# Altium PCB JacdacTempRhEc30 116.PcbDoc
Units mm, origin at the board's own origin, x right, y up, seen from the top; angles counter-clockwise.
Board outline 26.5 x 25 mm, 2 copper layers (Top Layer, Bottom Layer), stack 1.525 mm thick; 25 components, 26 nets, 90 pads, 20 vias.
Unrouted connection lines stored in the file: 10.
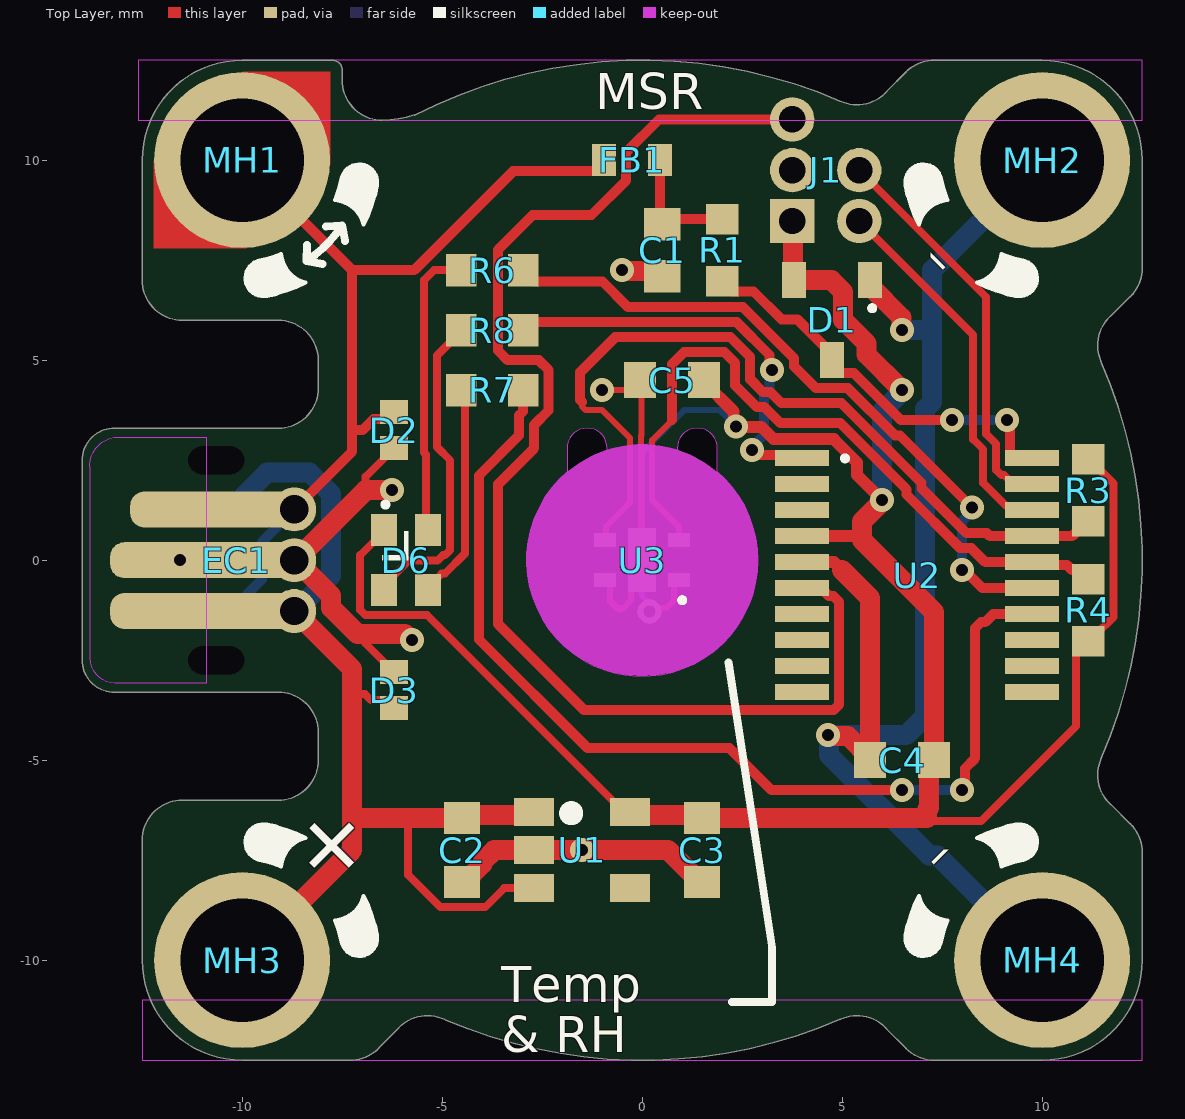
[diagram p0: Top Layer view]
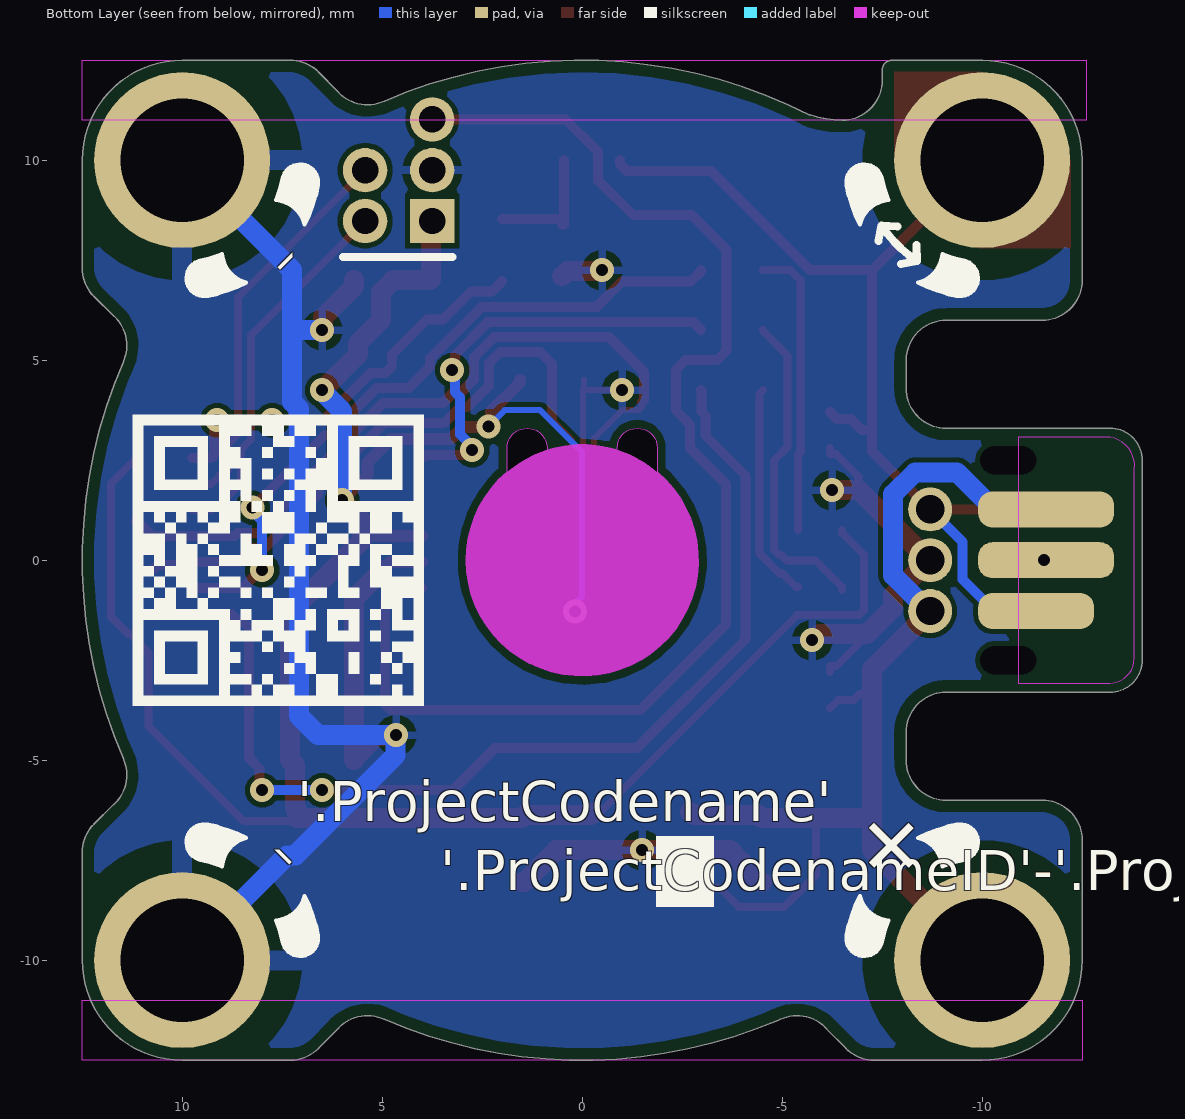
[diagram p1: Bottom Layer view, seen from below]
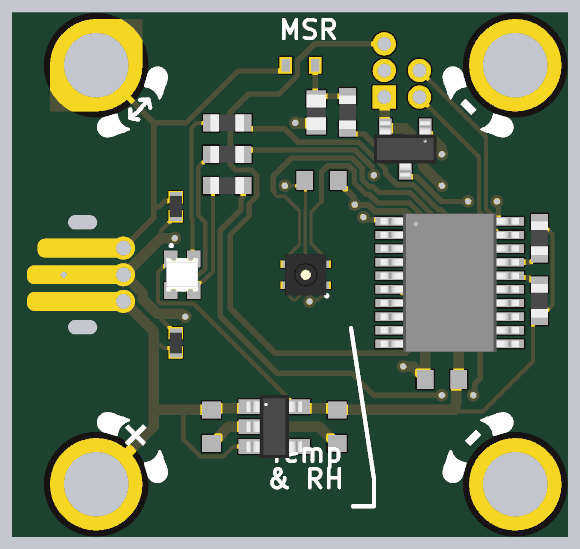
[diagram p2: 3D render of the assembled board from above, using the file's embedded part models]

## Layer stack, top to bottom
Top Solder: solder mask 0.0102, Solder Resist, Dk 3.5
Top Layer: signal copper 0.0356
Dielectric 1: core 1.454, FR-4, Dk 4.2
Bottom Layer: signal copper 0.0356
Bottom Solder: solder mask 0.0102, Solder Resist, Dk 3.5

## Board outline
-12.5,-7 cw(c-11.5,-7) -11.5,-6 -9.1,-6 ccw(c-9.1,-5) -8.1,-5 -8.1,-4.3 ccw(c-9.1,-4.3) -9.1,-3.3 -13.2,-3.3 cw(c-13.2,-2.5) -14,-2.5 -14,2.5 cw(c-13.2,2.5) -13.2,3.3 -9.1,3.3 -9.098,3.3 ccw(c-9.098,4.3) -8.098,4.3 -8.1,4.3 -8.1,5 ccw(c-9.1,5) -9.1,6 -11.5,6 cw(c-11.5,7) -12.5,7 -12.5,10 cw(c-10,10) -10,12.5 -7.75,12.5 cw(c-7.75,12.25) -7.5,12.25 -7.5,12 ccw(c-6.5,12) -6.5,11 ccw(c-6.5,13.5) -5.7,11.131 -5.698,11.126 cw(c0,0) 4.947,11.48 4.946,11.479 ccw(c5.369,12.385) 6.112,11.716 6.11,11.718 6.6,12.21 6.593,12.207 cw(c7.3,11.5) 7.3,12.5 10,12.5 cw(c10,10) 12.5,10 12.5,7.3 cw(c11.5,7.3) 12.207,6.593 12.21,6.6 11.718,6.11 11.716,6.112 ccw(c12.385,5.369) 11.479,4.946 11.48,4.947 cw(c0,0) 11.48,-4.947 11.479,-4.946 ccw(c12.385,-5.369) 11.716,-6.112 11.718,-6.11 12.21,-6.6 12.207,-6.593 cw(c11.5,-7.3) 12.5,-7.3 12.5,-10 cw(c10,-10) 10,-12.5 7.3,-12.5 cw(c7.3,-11.5) 6.593,-12.207 6.6,-12.21 6.11,-11.718 6.112,-11.716 ccw(c5.369,-12.385) 4.946,-11.479 4.947,-11.48 cw(c0,0) -4.904,-11.498 -4.946,-11.479 ccw(c-5.369,-12.385) -6.112,-11.716 -6.11,-11.718 -6.6,-12.21 -6.593,-12.207 cw(c-7.3,-11.5) -7.3,-12.5 -10,-12.5 cw(c-10,-10) -12.5,-10
cut-out: -1.091,1.555 ccw(c-1.377,1.966) -0.876,1.966 -0.876,2.8 ccw(c-1.376,2.8) -1.877,2.8 -1.877,2.211 ccw(c0,0) 2.9,0 ccw(c0,0) 1.877,2.211 1.877,2.8 ccw(c1.377,2.8) 0.877,2.8 0.876,1.966 ccw(c1.377,1.966) 1.091,1.555 cw(c0,0) 1.9,0 cw(c0,0)

## Design rules (kind name [scope] priority, off if disabled: settings)
AssemblyTestPointUsage [All] p1: valid=2
BoardOutlineClearance [All] p1: gap=0.3 ignorepadtopadclearanceinfootprint=FALSE except(0: Arc-SplitContinuation Track-SplitContinuation SMDPad-SplitContinuation THPad-SplitContinuation Via-SplitContinuation Fill-SplitContinuation Poly-SplitContinuation Region-OutlineEdge Region-SplitContinuation Text-OutlineEdge Text-SplitContinuation; 0.2: Track-OutlineEdge Fill-CavityEdge Fill-CutoutEdge Fill-SplitBarrior Poly-CavityEdge Poly-CutoutEdge Poly-SplitBarrior Text-CavityEdge Text-CutoutEdge Text-SplitBarrior; 0.25: SMDPad-OutlineEdge)
Clearance "Clearance MH" [InComponent('MH1') OR InComponent('MH2') OR InComponent('MH3') OR InComponent('MH4')] p1: gap=0.125 ignorepadtopadclearanceinfootprint=FALSE except(0: Arc-Hole Track-Hole SMDPad-Hole THPad-Hole Via-Hole Fill-Hole Poly-Hole Region-Hole Text-Hole; 0.8: Arc-Fill Arc-Poly Arc-Region Track-Fill Track-Poly Track-Region SMDPad-Fill SMDPad-Poly SMDPad-Region THPad-Fill THPad-Poly THPad-Region Via-Fill Via-Poly Via-Region Fill-Fill Fill-Poly Fill-Region Poly-Poly Poly-Region Region-Region)
Clearance [All] p2: gap=0.125 ignorepadtopadclearanceinfootprint=FALSE except(0: Arc-Hole Track-Hole SMDPad-Hole THPad-Hole Via-Hole Fill-Hole Poly-Hole Region-Hole Text-Hole)
ComponentClearance [All] p1: gap=0.1 collisioncheckmode=3 verticalgap=0.254 showdistances=FALSE
DiffPairsRouting [All] p1: maxlimit=2 minlimit=0.15 mostfreqgap=0.15 toplayer_minwidth=0.15 toplayer_maxwidth=2 toplayer_prefwidth=0.15 bottomlayer_minwidth=0.15 bottomlayer_maxwidth=2 bottomlayer_prefwidth=0.15 substack1={CB9D278B-8BF5-444A-AAF4-837A2A9DF42D} toplayer_{cb9d278b-8bf5-444a-aaf4-837a2a9df42d}_minwidth=0.381 toplayer_{cb9d278b-8bf5-444a-aaf4-837a2a9df42d}_maxwidth=0.381 toplayer_{cb9d278b-8bf5-444a-aaf4-837a2a9df42d}_prefwidth=0.381 bottomlayer_{cb9d278b-8bf5-444a-aaf4-837a2a9df42d}_minwidth=0.381 bottomlayer_{cb9d278b-8bf5-444a-aaf4-837a2a9df42d}_maxwidth=0.381 bottomlayer_{cb9d278b-8bf5-444a-aaf4-837a2a9df42d}_prefwidth=0.381 substack2={826B8647-A721-4255-895A-19F9591B9CD1} toplayer_{826b8647-a721-4255-895a-19f9591b9cd1}_minwidth=0.381 toplayer_{826b8647-a721-4255-895a-19f9591b9cd1}_maxwidth=0.381 toplayer_{826b8647-a721-4255-895a-19f9591b9cd1}_prefwidth=0.381 bottomlayer_{826b8647-a721-4255-895a-19f9591b9cd1}_minwidth=0.381 bottomlayer_{826b8647-a721-4255-895a-19f9591b9cd1}_maxwidth=0.381 bottomlayer_{826b8647-a721-4255-895a-19f9591b9cd1}_prefwidth=0.381 substack3={E64FCAF4-1BC8-437D-B1E0-0E5F2DC0F59E} toplayer_{e64fcaf4-1bc8-437d-b1e0-0e5f2dc0f59e}_minwidth=0.381 toplayer_{e64fcaf4-1bc8-437d-b1e0-0e5f2dc0f59e}_maxwidth=0.381 toplayer_{e64fcaf4-1bc8-437d-b1e0-0e5f2dc0f59e}_prefwidth=0.381 bottomlayer_{e64fcaf4-1bc8-437d-b1e0-0e5f2dc0f59e}_minwidth=0.381 bottomlayer_{e64fcaf4-1bc8-437d-b1e0-0e5f2dc0f59e}_maxwidth=0.381 bottomlayer_{e64fcaf4-1bc8-437d-b1e0-0e5f2dc0f59e}_prefwidth=0.381 substack4={E61CE66C-507C-4E1E-8E83-C905434AFC1C} toplayer_{e61ce66c-507c-4e1e-8e83-c905434afc1c}_minwidth=0.381 toplayer_{e61ce66c-507c-4e1e-8e83-c905434afc1c}_maxwidth=0.381 toplayer_{e61ce66c-507c-4e1e-8e83-c905434afc1c}_prefwidth=0.381 bottomlayer_{e61ce66c-507c-4e1e-8e83-c905434afc1c}_minwidth=0.381 bottomlayer_{e61ce66c-507c-4e1e-8e83-c905434afc1c}_maxwidth=0.381 bottomlayer_{e61ce66c-507c-4e1e-8e83-c905434afc1c}_prefwidth=0.381 maxuncoupledlength=25
FabricationTestPointUsage [All] p1: valid=2 allowmultiple=FALSE
HoleSize [All] p1: absolutevalues=TRUE maxlimit=3.1 minlimit=0.2 maxpercent=80.000 minpercent=20.000
MinimumSolderMaskSliver [All] p1: minsoldermaskwidth=0.005
PlaneClearance [All] p1: clearance=0.3
PlaneConnect "PlaneConnect MH" [InComponent('MH1') OR InComponent('MH2') OR InComponent('MH3') OR InComponent('MH4')] p1: planeconnectstyle=Relief reliefexpansion=0.5 reliefentries=4 reliefconductorwidth=0.5 reliefairgap=0.4
PlaneConnect [All] p2: planeconnectstyle=Relief reliefexpansion=0.5 reliefentries=4 reliefconductorwidth=0.2 reliefairgap=0.3
PolygonConnect "PolygonConnect MH" [InComponent('MH1') OR InComponent('MH2') OR InComponent('MH3') OR InComponent('MH4')] p1: connectstyle=Relief reliefconductorwidth=0.5 reliefentries=4 polygonreliefangle="90 Angle" airgapwidth=0.8
PolygonConnect [All] p2: connectstyle=Relief reliefconductorwidth=0.2 reliefentries=4 polygonreliefangle="90 Angle" airgapwidth=0.2
RoutingVias [All] p1: holewidth=0.3 width=0.6 viastyle="Through Hole" minholewidth=0.3 minwidth=0.6 maxholewidth=0.5 maxwidth=0.8
SilkToSilkClearance [All] p1: silktosilkclearance=0.001
SilkToSolderMaskClearance [IsPad] p1: minsilkscreentomaskgap=0.05 clearancetoexposedcopper=TRUE
SolderMaskExpansion [All] p1: expansion=0.075 istentingtop=FALSE
Width [All] p1: maxlimit=2 minlimit=0.15 preferedwidth=0.15 substack1={CB9D278B-8BF5-444A-AAF4-837A2A9DF42D} substack2={826B8647-A721-4255-895A-19F9591B9CD1} substack3={E64FCAF4-1BC8-437D-B1E0-0E5F2DC0F59E} substack4={E61CE66C-507C-4E1E-8E83-C905434AFC1C} minimp=50.000000 maximp=50.000000 favimp=50.000000
20 further rules are at their usual default settings.

## Components (designator, comment, footprint, x,y, rotation, side; value= is the part's Value field where it differs from the comment)
C1 "33 pF" CC0603 0.5,7.75 r90 top
C2 "1uF 16V" "C0603 - without outline" -4.5,-7.25 r90 top
C3 "1uF 16V" "C0603 - without outline" 1.5,-7.25 r90 top
C4 "1uF 16V" "C0603 - without outline" 6.5,-5 r0 top
C5 "1uF 16V" "C0603 - without outline" 0.75,4.5 r0 top
D1 "BAT54S" "NXP-BAT54S-TO-236AB - WITHOUT OUTLINE" 4.75,6 r270 top
D2 "RCLAMP0521P-N" "TVS 0402 - XL" -6.2,3.25 r270 top
D3 "RCLAMP0521P-N" "TVS 0402 - XL" -6.2,-3.25 r90 top
D6 "TZ-P4-1615RGBTCA1-0.55T" TZ-P4-1615RGBTCA1-0.55T -5.9,0 r270 top
EC1 "3 pin JACDAC edge connector" JACDAC_EDGE_CONNECTOR_NO_TRACES -8.15,0 r90 top
FB1 "TDK MPZ1608S102ATA00" "TDK MPZ1608 0.8mm - without outline" -0.25,10 r0 top
J1 "Hack Connect Mini 1.27 mm pitch 2-row" HACK_CONNECT_MINI_5_X_1_27 3.75,8.48 r0 top
MH1 "MH_7.0MMK_4.4MMC_3.1MMD_PTH" MH_7.0MMK_4.4MMC_3.1MMD_PTH -10,10 r0 top
MH2 "MH_7.0MMK_4.4MMC_3.1MMD_PTH" MH_7.0MMK_4.4MMC_3.1MMD_PTH 10,10 r180 top
MH3 "MH_7.0MMK_4.4MMC_3.1MMD_PTH" MH_7.0MMK_4.4MMC_3.1MMD_PTH -10,-10 r0 top
MH4 "MH_7.0MMK_4.4MMC_3.1MMD_PTH" MH_7.0MMK_4.4MMC_3.1MMD_PTH 10,-10 r180 top
R1 "220R" RC0603 2,7.75 r270 top
R3 "10k" RC0603 11.15,1.75 r270 top
R4 "10k" RC0603 11.15,-1.25 r90 top
R6 "150R" RC0603 -3.75,7.25 r0 top
R7 "30R" RC0603 -3.75,4.25 r0 top
R8 "30R" RC0603 -3.75,5.75 r0 top
U1 "ME6211C33M5G-N" MICRONE-SOT23-5 -1.5,-7.25 r0 top
U2 "STM32G030F6P6" 20-TSSOP 6.875,-0.375 r0 top
U3 "SHTC3" SHTC3_4_WDFN 0,0 r180 top

## Footprints (in the part's own frame and the unit in brackets; to place one, negate y for a bottom-side part, rotate by r counter-clockwise, add the part's x,y. Pads: shape width x height; smd on the part's side, far side on the other; paste and mask are expansions set on the pad)
20-TSSOP [mm]
  rect 1.35x0.4 smd: 1(-2.875,2.925) 2(-2.875,2.275) 3(-2.875,1.625) 4(-2.875,0.975) 5(-2.875,0.325) 6(-2.875,-0.325) 7(-2.875,-0.975) 8(-2.875,-1.625) 9(-2.875,-2.275) 10(-2.875,-2.925) 11(2.875,-2.925) 12(2.875,-2.275) 13(2.875,-1.625) 14(2.875,-0.975) 15(2.875,-0.325) 16(2.875,0.325) 17(2.875,0.975) 18(2.875,1.625) 19(2.875,2.275) 20(2.875,2.925)
  silkscreen extent -1.85,2.87 -1.76,2.97, body extent -3.3,-3.3 3.3,3.3, height 1.2
"C0603 - without outline" [mm]
  rect 0.8x0.9 smd: 1(-0.8,0) 2(0.8,0)
  body extent -0.9,-0.5 0.9,0.5, height 0.9
CC0603 [mil]
  rect 32x36 smd: 1(-25.5,0) 2(25.5,0)
  body extent -33,-18 34,18, height 36
HACK_CONNECT_MINI_5_X_1_27 [mm]
  rect 1.11x1.11 hole 0.66: 1(0,0)
  round 1.11 hole 0.66: 2(1.676,0) 3(0,1.27) 4(1.676,1.27) 5(0,2.54)
JACDAC_EDGE_CONNECTOR_NO_TRACES [mm] "Jacdac 3 pin connector with no traces"
  rrect78% 0.9x2.9 smd far side paste-1 mask+0: 1(-1.27,3.2)
  rrect78% 0.9x4.3 smd paste-1 mask+0: 1(1.27,2.5)
  round 1.1 hole 0.71 paste-0.254 mask+0: 1(1.27,0.55) 2(0,0.55) 3(-1.27,0.55)
  rrect78% 0.9x3.4 smd far side paste-1 mask+0: 2(0,3.45) 2(0,3.45) 3(1.27,3.45)
  rrect78% 0.9x4.8 smd paste-1 mask+0: 2(0,2.75) 3(-1.27,2.75)
  round 0 hole 0.7 slot 1.4 at 90 deg unplated: ""(-2.5,2.5) ""(2.5,2.5)
  Top Layer keep-out region: -3.075,2.75 -3.07,5.033 -2.987,5.341 -2.761,5.567 -2.453,5.65 -2.453,5.65 2.27,5.65 2.545,5.635 2.794,5.516 2.978,5.31 3.07,5.05 3.07,5.05 3.07,2.75
  Bottom Layer lines w0.2: -1.27,0.85 -1.126,0.85
  Bottom Layer keep-out region: -3.07,2.75 -3.07,5.033 -3.023,5.269 -2.889,5.469 -2.689,5.603 -2.453,5.65 -2.453,5.65 2.27,5.65 2.546,5.635 2.794,5.516 2.978,5.31 3.07,5.05 3.07,5.05 3.07,2.75
MH_7.0MMK_4.4MMC_3.1MMD_PTH [mm] "Jacdac mounting hole 7.0mm clearance, 4.4 annualar ring and 3.1mm PTH"
  round 4.4 hole 3.08 mask+0.3: 1(0,0)
MICRONE-SOT23-5 [mm]
  rect 1x0.7 smd: 1(-1.2,0.95) 2(-1.2,0) 3(-1.2,-0.95) 4(1.2,-0.95) 5(1.2,0.95)
  silkscreen extent -0.32,0.88 -0.23,0.97, body extent -1.32,-1.5 1.32,1.5, height 1.11
"NXP-BAT54S-TO-236AB - WITHOUT OUTLINE" [mm] "SOT23, 3-Leads, Body 2.90x2.30mm, Pitch 0.95mm, IPC Medium Density"
  rect 0.9x0.6 smd: 1(-1,0.95) 2(-1,-0.95) 3(1,0)
  silkscreen extent -0.35,0.95 -0.25,1.05, body extent -1.32,-1.5 1.32,1.5, height 1.12
RC0603 [mil]
  rect 30x32 smd: 1(-30.5,0) 2(30.5,0)
  body extent -31,-16 32,16, height 28
SHTC3_4_WDFN [mm] "Humidity Temperature Sensor 0 ~ 100% RH I²C ±2% RH 8s Surface Mount"
  rect 0.55x0.35 smd paste-0.5 mask+0.05: 1(-0.925,0.5) 2(-0.925,-0.5)
  rect 0.55x0.35 smd paste-0.6 mask+0.05: 3(0.925,-0.5)
  rect 0.55x0.35 smd paste-0.2 mask+0.05: 4(0.925,0.5)
  rect 0.7x1.6 smd paste-0.1 mask+0.05: 5(0,0)
  rect 0.45x0.35 on Top Paste paste-0.6 mask+0.05: ""(-0.875,-0.5) ""(-0.875,0.5) ""(0.875,-0.5) ""(0.875,0.5)
  silkscreen extent -1.05,0.95 -0.95,1.05, body extent -1,-1 1,1, height 0.75
"TDK MPZ1608 0.8mm - without outline" [mm]
  rect 0.6x0.8 smd paste-0.1: 1(-0.7,0) 2(0.7,0)
  body extent -0.8,-0.4 0.8,0.4, height 0.8
"TVS 0402 - XL" [mm] "TVS 0402 RoHS"
  rect 0.6x0.7 smd paste-0.06 mask+0.05: 1(-0.45,0) 2(0.45,0)
  body extent -0.5,-0.3 0.5,0.3, height 0.5
TZ-P4-1615RGBTCA1-0.55T [mm] "1615 Light Emitting Diodes (LED) RoHS"
  rect 0.8x0.65 smd mask+0.05: 1(-0.75,-0.55) 2(-0.75,0.55) 3(0.75,0.55) 4(0.75,-0.55)
  silkscreen extent -1.44,-0.6 0,0.05, body extent -0.8,-0.75 0.8,0.75, height 0.55

## Part data
C1: library part CC0603JRNPO9BN330, "33pF 0603 100V C0G/NPO", Capacitance=33pF, Case Code (Imperial)=0603, Case Code (Metric)=1608, Dielectric=C0G, Manufacturer=Yageo, Max Operating Temperature=125°C, Min Operating Temperature=-55°C, Tolerance=5%, Voltage Rating=100V, Case/Package=0603, Category="Ceramic Capacitors", ComponentLink1Description="Online datasheet", ComponentLink1URL=https://datasheet.ciiva.com/13207/upy-gp-np0-16v-to-50v-8-13207786.pdf, Composition=Ceramic, Depth=0.8mm, Height=0.8mm, Lead Free="Lead Free", Length=1.6mm, Manufacturer 1=Yageo, Manufacturer Part Number=CC0603JRNPO9BN330, Manufacturer Part Number 1=CC0603JRNPO9BN330, Mount="Surface Mount", Packaging="Tape and Reel", RoHS=Yes, Supplier 1=Digi-Key, Termination=SMD/SMT, Thickness=0.035inch, Voltage Rating (DC)=100V, Weight=7.1E-05oz, Width=0.8mm
C2 C3 C4 C5: library part CL10A105KO8NNNC, "SMD Multilayer Ceramic Capacitor, 1 µF, 16 V, 0603 [1608 Metric], ± 10%, X5R, CL Series", Capacitance=1uF, Case Code (Imperial)=0603, Case Code (Metric)=1608, Dielectric=X5R, Manufacturer=Samsung, Max Operating Temperature=85°C, Min Operating Temperature=-55°C, Package Quantity=1, Supplier Part Number 1=1276-1034-1-ND, Tolerance=10%, Voltage=16V, Case/Package=0603, Category="Ceramic Capacitors", ComponentLink1Description="Online datasheet", ComponentLink1URL=https://datasheet.lcsc.com/lcsc/1811021622_Samsung-Electro-Mechanics-CL10A105KO8NNNC_C1592.pdfq, Construction=Flat, Contact Plating=Tin, Depth=0.8mm, Height=0.8mm, Lead Free="Lead Free", Length=1.6mm, Manufacturer 1=Samsung, Manufacturer Part Number=CL10A105KO8NNNC, Manufacturer Part Number 1=CL10A105KO8NNNC, Material=Ceramic, Mount="Surface Mount", Packaging="Tape and Reel", Pricing 1="1=0.10000, 10=0.03600, 50=0.01960, 100=0.01600, 500=0.01144, 1000=0.00898 (USD)", Radiation Hardening=No, RoHS=Yes, RoHS Compliant=Yes, Series=CL, Stock 1=3575337, Supplier 1=Digi-Key, Supplier 2=Farnell, Supplier 3=RSComponents, Supplier 4=Mouser, Supplier 5=LCSC, Supplier Part Number 2=3013384, Supplier Part Number 3=7664780, Supplier Part Number 4=187-CL10A105KO8NNNC, Supplier Part Number 5=C1592, Thickness=0.035inch, Voltage Rating=16V, Voltage Rating (DC)=16V, Width=0.031inch
D1: "DIODE ARRAY SCHOTTKY 30V SOT23", Manufacturer=Nexperia, Manufacturer Part Number=BAT54S,235, Supplier Part Number 1=1727-1868-1-ND, Category="Rectifier Diodes", ComponentLink1Description="NXP datasheet online", ComponentLink1URL=https://assets.nexperia.com/documents/data-sheet/BAT54_SER.pdf, Manufacturer 1=Nexperia, Manufacturer Part Number 1=BAT54S,235, Pricing 1="1=0.13000, 10=0.11900, 100=0.05610, 500=0.03326, 1000=0.02185, 5000=0.02138 (USD)", RoHS=No, Stock 1=14011, Supplier 1=Digi-Key, Supplier 2=Mouser, Supplier 3=RSComponents, Supplier Part Number 2=771-BAT54S235, Supplier Part Number 3=1707990
D2 D3: "Bidirectional 5V (Max) 6V 16V 3.5A (8/20us) 0402 TVS RoHS", Manufacturer="Born Semiconductor", Package=0402, Supplier1 Part Number=C316043, Checked By=?, ComponentLink1Description="Online datasheet", ComponentLink1URL=https://datasheet.lcsc.com/szlcsc/Bourne-Semicon-Shenzhen-RCLAMP0521P-N_C316043.pdf, Created By="D Gakure", Manufacturer 1="Born Semiconductor", Manufacturer Part Number=RCLAMP0521P-N, Manufacturer Part Number 1=RCLAMP0521P-N, Supplier1=LCSC
D6: "1615 Light Emitting Diodes (LED) RoHS", Manufacturer=TUOZHAN, Package=1615, Supplier Part Number 1=C779813, Category=Optoelectronics, Checked By=?, ComponentLink1Description="Online datasheet", ComponentLink1URL=https://datasheet.lcsc.com/szlcsc/2009041238_TUOZHAN-TZ-P4-1615RGBTCA1-0-55T_C779813.pdf, Created By="D. Gakure", Manufacturer 1=TUOZHAN, Manufacturer Part Number=TZ-P4-1615RGBTCA1-0.55T, Manufacturer Part Number 1=TZ-P4-1615RGBTCA1-0.55T, Packaging="Tape & Reel (TR)", RoHS="RoHS Compliant", Size / Dimension=1.6x1.5mm, Supplier 1=LCSC
EC1: library part "Jacdac edge connector", "3 pin Jacdac edge connector 1.27mm pitch", Manufacturer Part Number=JACDAC_EDGE_CONNECTOR, Checked By=?, ComponentLink1Description="Yuliang JACDAC cable connector drawing online", ComponentLink1URL=https://github.com/microsoft/jacdac-mdk/blob/main/connector/JACDAC-Connector-by-Yuliang-2020-11-28.pdf, ComponentLink2Description="JACDAC PCB edge connector spec onlin", ComponentLink2URL=https://github.com/microsoft/jacdac-mdk/blob/main/connector/JACDAC_PCB_Edge_Connector_Drawing_JD-PEC-01_rev_01.pdf, Created By="D. Gakure", PCB Type="1.6mm FR4"
FB1: "0603 1k@100MHz 0.8A chip", Case Code (Imperial)=0603, Case Code (Metric)=1608, Current Rating=800mA, DC Resistance (DCR)=300mR, Manufacturer=TDK, Manufacturer Part Number=MPZ1608S102ATA00, Package Quantity=4000, Supplier Part Number 1=445-8694-1-ND, Tolerance=25%, Case/Package=0603, ComponentLink2Description="datasheet online", ComponentLink2URL=https://www.mouser.co.uk/datasheet/2/400/eads_commercial_power_mpz1608_en-923650.pdf, ComponentLink3Description=datasheet, ComponentLink3URL="Y:\System\Altium\Libraries 2014\TDK\Datasheets\eads_commercial_power_mpz1608_en-923650.pdf", Core Material=Ferrite, Height=0.037inch, Impedance="1kR @ 100MHz", Length=0.063inch, Manufacturer 1=TDK, Manufacturer Part Number 1=MPZ1608S102ATA00, Max DC Current=800mA, Mount="Surface Mount", Packaging="Tape and Reel", Pricing 1="1=0.1, 10=0.079, 25=0.0716, 50=0.0644, 100=0.0472, 250=0.03432, 500=0.03146, 1000=0.02717 (USD)", Stock 1=113542, Supplier 1=Digi-Key, Supplier 2=Mouser, Supplier Part Number 2=810-MPZ1608S102ATA00, Width=0.031inch
J1: library part HACK_CONNECT_MINI
MH1 MH2 MH3 MH4: "Mounting Hole 7.0mm keepout, 4.4mm annualar ring and 3.1mm Drill PTH", Annular Ring=4.4mm, Hole Clearance=7.0mm, Hole Diameter=3.1mm, Hole Size=M3, Hole Type=PTH
R1: library part RC0603FR-07220RL, "Res Thick Film 0603 220 Ohm 1% 0.1W(1/10W) ±100ppm/°C Pad SMD T/R", Case Code (Imperial)=0603, Case Code (Metric)=1608, Manufacturer=Yageo, Max Operating Temperature=155°C, Max Power Dissipation=100mW, Min Operating Temperature=-55°C, Package Quantity=1, Resistance Tolerance=1%, Resistor Type="Thick Film", Supplier Part Number 1=311-220HRCT-ND, Temperature Coefficient=100ppm/°C, Voltage Rating=50V, Case/Package=0603, Category="Chip SMD Resistors", ComponentLink1Description="Online datasheet", ComponentLink1URL=https://datasheet.ciiva.com/11819/0900766b80f96399-11819290.pdf, Construction=Rectangular, Depth=0.8mm, Features="Moisture Resistant", Height=0.022inch, Lead Free="Lead Free", Length=1.6mm, Manufacturer 1=Yageo, Manufacturer Part Number=RC0603FR-07220RL, Manufacturer Part Number 1=RC0603FR-07220RL, Military Standard=Not, Number of Pins=2, Number of Terminations=2, Packaging="Tape and Reel", Power Rating=100mW, Pricing 1="1=0.10000, 10=0.02400, 100=0.00970, 1000=0.00436, 2500=0.00378 (USD)", REACH SVHC="No SVHC", Resistance=220R, RoHS=Yes, RoHS Compliant=Yes, Series=RC, Size Code=0603, Stock 1=242327, Supplier 1=Digi-Key, Supplier 2=Farnell, Supplier 3=RSComponents, Supplier 4=Mouser, Supplier 5=LCSC, Supplier Part Number 2=9238409, Supplier Part Number 3=1995497, Supplier Part Number 4=603-RC0603FR-07220RL, Supplier Part Number 5=C107696, Termination=SMD/SMT, Tolerance=1%, Voltage Rating (DC)=50V, Width=0.031inch
R3 R4: library part RC0603FR-07220RL, "Res Thick Film 0603 10k ohm 1% 0.1W(1/10W) ±100ppm/°C Pad SMD T/R", Case Code (Imperial)=0603, Case Code (Metric)=1608, Manufacturer=Yageo, Manufacturer Part Number=RC0603FR-0710KL, Max Operating Temperature=155°C, Max Power Dissipation=100mW, Min Operating Temperature=-55°C, Package Quantity=1, Resistance Tolerance=1%, Resistor Type="Thick Film", Temperature Coefficient=100ppm/°C, Voltage Rating=50V, Case/Package=0603, Category="Chip SMD Resistors", ComponentLink1Description="Online datasheet", ComponentLink1URL=https://datasheet.ciiva.com/11819/0900766b80f96399-11819290.pdf, Construction=Rectangular, Depth=0.8mm, Features="Moisture Resistant", Height=0.022inch, Lead Free="Lead Free", Length=1.6mm, Manufacturer 1=Yageo, Manufacturer Part Number 1=RC0603FR-0710KL, Military Standard=Not, Number of Pins=2, Number of Terminations=2, Packaging="Tape and Reel", Power Rating=100mW, REACH SVHC="No SVHC", Resistance=10k, RoHS=Yes, RoHS Compliant=Yes, Series=RC, Size Code=0603, Termination=SMD/SMT, Tolerance=1%, Voltage Rating (DC)=50V, Width=0.031inch
R6: library part RC0603FR-07150RL, "Res General Purpose Thick Film 0603 150 Ohm 1% 1/10W ±100ppm/°C Molded SMD Paper T/R", Case Code (Imperial)=0603, Case Code (Metric)=1608, Manufacturer=Yageo, Max Operating Temperature=155°C, Max Power Dissipation=100mW, Min Operating Temperature=-55°C, Package Quantity=5000, Resistance Tolerance=1%, Resistor Type="Thick Film", Supplier Part Number 1=311-150HRCT-ND, Temperature Coefficient=100ppm/°C, Voltage Rating=50V, Case/Package=0603, Category="Chip SMD Resistors", ComponentLink1Description="Online datasheet", ComponentLink1URL=https://datasheet.ciiva.com/11819/0900766b80f96399-11819290.pdf, Construction=Rectangular, Depth=0.8mm, Features="Moisture Resistant", Height=0.45mm, Lead Free="Lead Free", Length=1.6mm, Manufacturer 1=Yageo, Manufacturer Part Number=RC0603FR-07150RL, Manufacturer Part Number 1=RC0603FR-07150RL, Military Standard=Not, Number of Pins=2, Number of Terminations=2, Packaging="Tape and Reel", Power Rating=100mW, Pricing 1="1=0.10000, 10=0.02400, 100=0.00970, 1000=0.00436, 2500=0.00378 (USD)", REACH SVHC="No SVHC", Resistance=150R, RoHS=Yes, RoHS Compliant=Yes, Series=RC, Size Code=0603, Stock 1=2262542, Supplier 1=Digi-Key, Supplier 2=Farnell, Supplier 3=RSComponents, Supplier 4=Mouser, Supplier 5=LCSC, Supplier Part Number 2=9238387, Supplier Part Number 3=1995464, Supplier Part Number 4=603-RC0603FR-07150RL, Supplier Part Number 5=C114608, Termination=SMD/SMT, Tolerance=1%, Voltage Rating (DC)=50V, Width=0.8mm
R7 R8: library part RC0603FR-0730RL, "Res Thick Film 0603 30 Ohm 1% 0.1W(1/10W) ±100ppm/C Pad SMD T/R", Case Code (Imperial)=0603, Case Code (Metric)=1608, Manufacturer=Yageo, Max Operating Temperature=155°C, Max Power Dissipation=100mW, Min Operating Temperature=-55°C, Package Quantity=1, Resistor Type="Thick Film", Supplier Part Number 1=311-30.0HRCT-ND, Temperature Coefficient=100ppm/°C, Tolerance=1%, Voltage Rating=50V, Case/Package=0603, Category="Chip SMD Resistors", ComponentLink1Description="Online datasheet", ComponentLink1URL=https://datasheet.ciiva.com/11819/0900766b80f96399-11819290.pdf, ComponentLink5Description=https://datasheet.ciiva.com/2455/pyu-r-int-thick-7-2455121.pdf?src-supplier=Digi-Key, ComponentLink5URL=https://datasheet.ciiva.com/2455/pyu-r-int-thick-7-2455121.pdf?src-supplier=Digi-Key, Construction=Rectangular, Depth=0.8mm, Features="Moisture Resistant", Height=0.022inch, Lead Free="Lead Free", Length=0.063inch, Manufacturer 1=Yageo, Manufacturer Part Number=RC0603FR-0730RL, Manufacturer Part Number 1=RC0603FR-0730RL, Military Standard=Not, Mount="Surface Mount", Number of Terminations=2, Packaging="Tape and Reel", Power Rating=100mW, Pricing 1="1=0.10000, 10=0.02400, 100=0.00970, 1000=0.00436, 2500=0.00378 (USD)", Resistance=30R, RoHS=Yes, RoHS Compliant=Yes, Series=RC, Size Code=0603, Stock 1=181493, Supplier 1=Digi-Key, Supplier 2=Farnell, Supplier 3=Mouser, Supplier 5=LCSC, Supplier Part Number 2=3495813, Supplier Part Number 3=603-RC0603FR-0730RL, Supplier Part Number 5=C128060, Technology="THICK FILM", Termination=SMD/SMT, Voltage Rating (DC)=50V, Width=0.031inch
U1: "6V 260mV @ 200mA(typ) - - Fixed 3.3V SOT-23-5 Linear Voltage Regulators (LDO) ROHS", Case/Package=SOT-23-5, Dropout Voltage=200mV, Manufacturer="MICRONE(Nanjing Micro One Elec)", Max Input Voltage=6, Min Output Voltage=3.3V, Output Current=500mA, Supplier Part Number=C82942, Category="Voltage Regulators - Linear", ComponentLink3Description="On Semi datasheet online", ComponentLink3URL=https://datasheet.lcsc.com/lcsc/1811131510_MICRONE-Nanjing-Micro-One-Elec-ME6211C33M5G-N_C82942.pdf, Created=DG, Manufacturer 1="MICRONE(Nanjing Micro One Elec)", Manufacturer Part Number=ME6211C33M5G-N, Manufacturer Part Number 1=ME6211C33M5G-N, Mount="Surface Mount", Number of Regulators=1, Output Configuration=Positive, Output Type=Fixed, Pricing 1="1=0.33000, 10=0.24900, 25=0.21760, 100=0.12440, 250=0.11664, 500=0.09330, 1000=0.07153 (USD)", Stock 1=32529, Supplier 1=LCSC
U2: "ARM® Cortex®-M0+ series IC 64MHz 32KB 20-TSSOP", Manufacturer=STMicroelectronics, Supplier Part Number 1=497-STM32G030F6P6-ND, Supplier Part Number 10=C724040, Category=Microcontrollers, ComponentLink1Description="Online datasheet", ComponentLink1URL=https://www.st.com/resource/en/datasheet/stm32g030f6.pdf, ComponentLink2Description="Online reference manual", ComponentLink2URL=https://www.st.com/resource/en/reference_manual/rm0454-stm32g0x0-advanced-armbased-32bit-mcus-stmicroelectronics.pdf, Manufacturer 1=STMicroelectronics, Manufacturer Part Number=STM32G030F6P6, Manufacturer Part Number 1=STM32G030F6P6, Pricing 1="1=1.85000, 10=1.65300, 74=1.56905, 148=1.28892, 296=1.20486, 444=1.06475, 962=0.93400 (USD)", RoHS=Yes, RoHS Compliant=Yes, Supplier 1=Digi-Key, Supplier 2=Farnell, Supplier 3=Mouser, Supplier 10=LCSC, Supplier Part Number 2=3294301, Supplier Part Number 3=511-STM32G030F6P6
U3: "Humidity Temperature Sensor 0 ~ 100% RH I²C ±2% RH 8s Surface Mount", Case/Package=DFN, Manufacturer=Sensirion, Max Operating Temperature=125°C, Min Operating Temperature=-40°C, Supplier Part Number 1=1649-1100-1-ND, Accuracy=2%, Category="Sensors Transducers", Checked By=?, ComponentLink1Description="Online datasheet", ComponentLink1URL=https://media.digikey.com/pdf/Data%20Sheets/Sensirion%20PDFs/HT_DS_SHTC3_D1.pdf, Created By="D. Gakure", Manufacturer 1=Sensirion, Manufacturer Part Number=SHTC3, Manufacturer Part Number 1=SHTC3, Mount="Surface Mount", Output Type=I2C, Packaging="Tape and Reel", Pricing 1="1=2.98000, 5=2.76200, 10=2.29500, 25=1.91240, 50=1.70000, 100=1.61500, 500=1.36000, 1000=1.27500 (USD)", Pricing 2="1=2.44000, 10=2.03000, 50=1.50000, 100=1.43000, 1000=1.13000, 10000=0.93700 (USD)", Pricing 3="1=2.94000, 25=1.98000, 50=1.84000, 250=1.59000, 500=1.56000 (GBP)", Pricing 4="2500=1.13700 (USD)", Response Time=8s, RoHS=No, Sensor Type=Temperature, Stock 1=10507, Stock 2=13209, Stock 3=3479, Stock 4=1085, Supplier 1=Digi-Key, Supplier 2=Mouser, Supplier 3=Farnell, Supplier 4=RSComponents, Supplier Part Number 2=403-SHTC3, Supplier Part Number 3=3106918, Supplier Part Number 4=1950668

## Via types
v1: diameter 0.6, hole 0.3, Top Layer to Bottom Layer, tented both sides, 20 vias

## Nets (pads, with @x,y where several pads share a name; then routed paths per layer and width w, separated by ;. In a path a pad name is that pad's centre, name@x,y a point inside that pad or via, vN(x,y) a via of type N, cw(c..) or ccw(c..) an arc to the next point about the centre after c; other vN are vias at no path point)
3V3: C3.2 C4.2 C5.2 D1.2 D6.1 J1.1 R3.1 R4.1 U1.5 U2.4 U3.1 | length 64.7
  Top Layer w0.15: v1@0.183,-1.279 v1(0.183,-1.277) 0.269,-1.191 0.609,-1.191 0.8,-1 0.8,-0.6 0.9,-0.5 U3.1 ; U3.1@0.725,-0.6 U3.1@0.825,-0.5
  Top Layer w0.2: D6.1@-6.5,0.75 -6.5,0.675 -7.05,0.125 -7.05,-1.243 -6.918,-1.375 -5.375,-1.375 -0.45,-6.3 U1.5 ; 7.125,-6.45 7.2,-6.525 8.467,-6.525 10.844,-4.149 10.844,-2.306 11.314,-1.835 11.365,-1.835 11.781,-1.419 11.781,1.919 11.175,2.525 R3.1
  Top Layer w0.3: C5.2 1.55,4.45 2.282,3.718 2.282,3.405 v1(2.34,3.348) ; v1@2.256,3.264 2.317,3.325 2.988,3.325 3.288,3.025 4.789,3.025 5.366,2.448 5.366,2.134 v1(6,1.5) ; U2.4 5.4,0.6 5.5,0.5
  Top Layer w0.5: U1.5 -0.225,-6.375 1.425,-6.375 C3.2 7.125,-6.45 7.125,-6.244 7.175,-6.194 7.175,-5.125 C4.2 7.3,-1.3 5.5,0.5 5.5,0.973 6,1.473 v1(6,1.5) ; J1.1 3.775,8.455 3.775,7.025 D1.2 4.732,7 5.025,6.707 5.025,6.005 5.606,5.424 5.606,5.144 v1(6.5,4.25)
  Bottom Layer w0.15: v1(0.183,-1.277) 0.097,-1.191 0.097,-0.997 0,-0.9 0,2.7 1.05,3.75 1.938,3.75 v1(2.34,3.348)
  Bottom Layer w0.5: v1(6,1.5) 6,3.723 6.5,4.223 v1(6.5,4.25)
AN: U2.12
GND: C1.1 C2.1 C3.1 C4.1 C5.1 D1.1 D2.2 D3.2 EC1.2 J1.3 MH2.1 MH4.1 U1.2 U2.5 U3.4 U3.5 | length 61.1
  Top Layer w0.15: v1(-1,4.25) -0.05,4.25 C5.1 ; U3.4 -0.825,-0.5 -0.8,-0.525 -0.8,-1.025 -0.616,-1.209 -0.492,-1.209 -0.275,-0.993 -0.275,-0.275 U3.5 -0.019,0.019 -0.019,1.063 -0.025,1.069 -0.025,3.114 -0.019,3.119 C5.1@-0.019,4.25
  Top Layer w0.2: -6.912,-1.75 -6.912,-1.85 -6.912,-2.088 -6.35,-2.65 -6.2,-2.65 D3.2 ; -6.912,1.75 -6.912,2.088 -6.35,2.65 -6.2,2.65 D2.2
  Top Layer w0.3: U2.5 4.8,-0.05 5,-0.25
  Top Layer w0.5: EC1.2@-8.7,0 EC1.2@-8.662,0 ; v1(-6.25,1.75) -6.912,1.75 EC1.2@-8.662,0 ; v1(-5.75,-2) -5.777,-2 -5.927,-1.85 -6.912,-1.85 -7.115,-1.85 -7.775,-1.19 -7.775,-0.887 EC1.2@-8.662,0 ; C2.1 -4.45,-8.05 -3.993,-7.593 -3.993,-7.543 -3.7,-7.25 U1.2 v1(-1.5,-7.25) 0.65,-7.25 1.45,-8.05 C3.1 ; v1(-0.5,7.25) -0.481,7.231 0.371,7.231 C1.1 ; v1(4.65,-4.375) 4.669,-4.394 5.144,-4.394 5.7,-4.95 C4.1 5.7,-0.95 5,-0.25 ; D1.1 5.7,6.85 6.481,6.069 6.481,5.769 v1(6.5,5.75)
  Bottom Layer w0.5: v1(6.5,5.75) 7.25,5.75 ; MH4.1 7.378,-7.378 7.173,-7.378 4.669,-4.874 4.669,-4.394 v1(4.65,-4.375) 6.6,-4.375 7.075,-3.9 7.075,3.78 7.25,3.955 7.25,5.75 ; MH2.1 7.25,7.25 7.25,5.75
  other v1: -11.55,0
INT: U2.3
JD_DATA: D2.1 EC1.1 FB1.1 MH1.1 | length 25.4
  Top Layer w0.25: EC1.1@-10.65,1.27 -8.7,1.27 -7.25,2.72 -7.25,3.25 ; MH1.1 -7.25,7.25 ; D2.1 -6.375,3.525 -6.721,3.525 -6.996,3.25 -7.25,3.25 ; FB1.1 -0.95,9.9 -1.125,9.725 -3.226,9.725 -5.701,7.25 -7.25,7.25 ; -7.25,3.25 -7.25,7.25
  Bottom Layer w0.25: EC1.1@-11.325,-1.27 -10.3,-1.27 -9.511,-0.481 -9.511,0.459 EC1.1@-8.7,1.27
JD_DATA_MCU: D1.3 R1.2 U2.20 | length 10.1
  Top Layer w0.25: R1.2 2.256,6.719 2.781,6.719 3.479,6.022 3.878,6.022 4.75,5.15 D1.3 ; D1.3@4.75,4.85 4.925,4.675 5.296,4.675 6.471,3.5 v1(7.75,3.5) ; v1(9.125,3.5) 9.192,3.433 9.192,3.213 9.2,3.205 9.2,2.625 9.275,2.55 U2.20
  Bottom Layer w0.25: v1(7.75,3.5) v1(9.125,3.5)
JD_PWR: C2.2 D3.1 EC1.3 MH3.1 U1.1 U1.3 | length 29.2
  Top Layer w0.2: -7.25,-3.5 -7.1,-3.35 -6.934,-3.35 -6.784,-3.5 -6.4,-3.5 D3.1 ; -5.85,-6.45 -5.85,-7.868 -5.043,-8.675 -3.925,-8.675 -3.45,-8.2 U1.3
  Top Layer w0.5: MH3.1 -7.25,-7.25 -7.25,-6.5 ; EC1.3@-8.7,-1.27 -7.25,-2.72 -7.25,-3.5 -7.25,-6.5 ; U1.1 -2.775,-6.375 -4.425,-6.375 C2.2 -5.85,-6.45 -7.2,-6.45 -7.25,-6.5
  Bottom Layer w0.5: EC1.3@-11.575,1.27 -10.3,1.27 -9.375,2.195 -8.317,2.195 -7.775,1.653 -7.775,-0.383 -8.662,-1.27 EC1.3@-8.7,-1.27
JD_STATUS: U2.2
MISO: U2.13
NetC1_2: C1.2 FB1.2 R1.1 | length 3.2
  Top Layer w0.25: FB1.2 0.45,8.398 C1.2 ; C1.2@0.5,8.525 R1.1
NetD6_2: D6.2 R6.1 | length 7.3
  Top Layer w0.2: D6.2@-5.4,0.75 -5.4,2.638 -5.456,2.693 -5.456,7 -5.206,7.25 R6.1
NetD6_3: D6.3 R7.1 | length 5.4
  Top Layer w0.2: D6.3@-5.4,-0.675 -5.35,-0.675 -5.012,-0.337 -4.934,-0.337 -4.432,0.166 -4.432,4.157 R7.1
NetD6_4: D6.4 R8.1 | length 8
  Top Layer w0.2: D6.4@-6.5,-0.75 -6.5,-0.675 -5.837,-0.012 -5.119,-0.012 -4.982,0.125 -4.932,0.125 -4.8,0.257 -4.8,2.497 -5.131,2.828 -5.131,5.119 -4.525,5.725 R8.1
nRESET: J1.5 U2.6 | length 33.1
  Top Layer w0.25: J1.5 0.416,11.02 -0.4,10.204 -0.4,9.496 -1.268,8.628 -2.738,8.628 -3.606,7.76 -3.606,5.24 -3.366,5 -2.584,5 -2.344,4.76 -2.344,3.74 -2.7,3.384 -2.7,2.8 -3.6,1.9 -3.6,-1.6 -1.45,-3.75 4.779,-3.75 4.925,-3.604 4.925,-1.046 4.779,-0.9 4.675,-0.9 4.475,-0.7 U2.6
PWM: U2.11
RST: U2.7
RX/CS: U2.10
SCK: U2.8
SCL: R4.2 U2.16 U3.2 | length 17.7
  Top Layer w0.15: 0.75,3.5 0.25,3 0.25,1.5 0.925,0.825 U3.2
  Top Layer w0.25: 0.75,3.5 0.75,4.904 1.046,5.2 2.054,5.2 2.325,4.929 2.325,4.367 2.867,3.825 3.054,3.825 3.454,3.425 4.955,3.425 6.608,1.772 6.608,1.642 7.95,0.3 8.228,0.3 8.578,-0.05 U2.16 9.825,-0.125 10.625,-0.125 R4.2@10.75,-0.25
SDA: R3.2 U2.17 U3.3 | length 20.9
  Top Layer w0.15: -1.5,3.957 -1.5,3.838 -1.412,3.75 -1,3.75 -0.3,3.05 -0.3,1.45 -0.902,0.848 -0.902,0.523 U3.3
  Top Layer w0.25: -1.5,3.957 -1.55,4.007 -1.55,4.7 -0.675,5.575 2.209,5.575 2.7,5.084 2.7,4.522 3.022,4.2 3.209,4.2 3.484,3.925 4.985,3.925 6.983,1.927 6.983,1.797 8.105,0.675 8.615,0.675 8.69,0.6 10.749,0.6 11.125,0.975 R3.2
STATUS_B: R8.2 U2.1 | length 10.5
  Top Layer w0.25: R8.2 -2.775,5.95 2.364,5.95 3.183,5.131 3.183,4.817 v1(3.25,4.75) ; v1(2.75,2.75) 2.845,2.75 2.97,2.625 3.925,2.625 U2.1
  Bottom Layer w0.25: v1(2.75,2.75) 2.75,2.845 3.05,3.145 3.05,4.067 3.183,4.2 3.183,4.683 v1(3.25,4.75)
STATUS_G: R7.2 U2.14 | length 26.1
  Top Layer w0.25: R7.2 -2.981,4.244 -2.981,3.719 -3.085,3.615 -3.085,3.115 -4.082,2.118 -4.082,-1.982 -1.363,-4.7 2.185,-4.7 3.235,-5.75 v1(6.5,-5.75) ; v1(8.001,-5.751) 8.067,-5.684 8.067,-5.207 8.325,-4.95 8.325,-1.696 8.471,-1.55 8.575,-1.55 8.775,-1.35 U2.14
  Bottom Layer w0.25: v1(6.5,-5.75) v1(8.001,-5.751)
STATUS_R: R6.2 U2.15 | length 17.4
  Top Layer w0.25: R6.2 -2.975,7.225 -2.719,6.969 -0.996,6.969 -0.353,6.325 2.52,6.325 3.8,5.045 3.8,4.846 4.346,4.3 5.14,4.3 6.325,3.115 6.443,3.115 v1(8.242,1.317) ; v1(8,-0.25) 8.055,-0.25 8.505,-0.7 U2.15
  Bottom Layer w0.25: v1(8,-0.25) 8,0.98 8.242,1.222 v1(8.242,1.317)
SWCLK: J1.4 U2.19 | length 10
  Top Layer w0.2: J1.4 8.6,6.576 8.6,3.158 8.85,2.908 8.85,2.257 8.982,2.125 9.05,2.125 9.275,1.9 U2.19
SWDIO: J1.2 U2.18 | length 9.3
  Top Layer w0.2: J1.2 8.275,5.631 8.275,3.023 8.525,2.773 8.525,1.932 9.107,1.35 9.175,1.35 9.275,1.25 U2.18
TX/MOSI: U2.9
pads on no net: EC1. U1.4 U3.

## Polygon pours and split planes (outlines as drawn)
no net on Bottom Assy "NONET_L-01_P-001" (hatched 45Degree grid 0.3 track 0.01): -6.5,11 ccw(c-6.5,12) -5.5,12 -5.5,12.25 cw(c-5.25,12.25) -5.25,12.5 10,12.5 cw(c10,10) 12.5,10 12.5,7.554 12.503,7.554 cw(c10,10) 6.646,11
no net on Bottom Assy "NONET_L-01_P-001" (hatched 45Degree grid 0.3 track 0.01): -12.5,-10 -12.5,-7.018 -12.5,-7 cw(c-11.5,-7) -11.5,-6 -9.1,-6 ccw(c-9.1,-5) -8.1,-5 -8.1,-4.3 ccw(c-9.1,-4.3) -9.1,-3.3 -13.2,-3.3 cw(c-13.2,-2.5) -14,-2.5 -14,2.5 cw(c-13.2,2.5) -13.2,3.3 -9.1,3.3 ccw(c-9.1,4.3) -8.1,4.3 -8.1,5 ccw(c-9.1,5) -9.1,6 -11.5,6 cw(c-11.5,7) -12.5,7 -12.5,7.003 -12.5,10 cw(c-10,10) -10,12.5 -7.729,12.5 -7.75,12.5 cw(c-7.75,12.25) -7.5,12.25 -7.5,12 ccw(c-6.5,12) -6.656,11.012 -6.65,11.015 cw(c-10,10) -7,8.197 -7,-8.197 cw(c-10,-10) -6.646,-11 6.646,-11 cw(c10,-10) 12.503,-7.554 12.5,-7.554 12.5,-10 cw(c10,-10) 10,-12.5 -7.729,-12.5 -10,-12.5 cw(c-10,-10)
no net on Bottom Assy "NONET_L-01_P-001" (hatched 45Degree grid 0.15 track 0.01): 8.342,12.5 ccw(c10,10) 12.5,8.342 12.5,10 ccw(c10,10) 10,12.5
no net on Bottom Assy "NONET_L-01_P-001" (hatched 45Degree grid 0.15 track 0.01): 8.342,-12.5 10,-12.5 ccw(c10,-10) 12.5,-10 12.5,-8.342 ccw(c10,-10)
no net on Bottom Assy "NONET_L-01_P-001" (hatched 45Degree grid 0.15 track 0.01): -12.5,-8.342 cw(c-10,-10) -8.342,-12.5 -10,-12.5 cw(c-10,-10) -12.5,-10
no net on Bottom Assy "NONET_L-01_P-001" (hatched 45Degree grid 0.15 track 0.01): -12.5,8.342 ccw(c-10,10) -8.342,12.5 -10,12.5 ccw(c-10,10) -12.5,10
no net on Bottom Assy "NONET_L-01_P-001" (hatched 45Degree grid 0.15 track 0.01): -13.6,-2.468 ccw(c-13.2,-2.468) -13.2,-2.868 -9.3,-2.868 -9.3,2.874 -13.198,2.874 -13.2,2.874 ccw(c-13.2,2.474) -13.6,2.474 -13.6,2.477
GND on Bottom Layer "NONET_L-01_P-001" (solid, pour order 0): -12.5,-7 cw(c-11.5,-7) -11.5,-6 -9.1,-6 ccw(c-9.1,-5) -8.1,-5 -8.1,-4.3 ccw(c-9.1,-4.3) -9.1,-3.3 -13.2,-3.3 cw(c-13.2,-2.5) -14,-2.5 -14,2.5 cw(c-13.2,2.5) -13.2,3.3 -9.1,3.3 -9.098,3.3 ccw(c-9.098,4.3) -8.098,4.3 -8.1,4.3 -8.1,5 ccw(c-9.1,5) -9.1,6 -11.5,6 cw(c-11.5,7) -12.5,7 -12.5,10 cw(c-10,10) -10,12.5 -7.75,12.5 cw(c-7.75,12.25) -7.5,12.25 -7.5,12 ccw(c-6.5,12) -6.5,11 ccw(c-6.5,13.5) -5.7,11.131 -5.698,11.126 cw(c0,0) 4.947,11.48 4.946,11.479 ccw(c5.369,12.385) 6.112,11.716 6.11,11.718 6.6,12.21 6.593,12.207 cw(c7.3,11.5) 7.3,12.5 10,12.5 cw(c10,10) 12.5,10 12.5,7.3 cw(c11.5,7.3) 12.207,6.593 12.21,6.6 11.718,6.11 11.716,6.112 ccw(c12.385,5.369) 11.479,4.946 11.48,4.947 cw(c0,0) 11.48,-4.947 11.479,-4.946 ccw(c12.385,-5.369) 11.716,-6.112 11.718,-6.11 12.21,-6.6 12.207,-6.593 cw(c11.5,-7.3) 12.5,-7.3 12.5,-10 cw(c10,-10) 10,-12.5 7.3,-12.5 cw(c7.3,-11.5) 6.593,-12.207 6.6,-12.21 6.11,-11.718 6.112,-11.716 ccw(c5.369,-12.385) 4.946,-11.479 4.947,-11.48 cw(c0,0) -4.904,-11.498 -4.946,-11.479 ccw(c-5.369,-12.385) -6.112,-11.716 -6.11,-11.718 -6.6,-12.21 -6.593,-12.207 cw(c-7.3,-11.5) -7.3,-12.5 -10,-12.5 cw(c-10,-10) -12.5,-10
no net on Fabrication Notes "NONET_L-01_P-001" (hatched 45Degree grid 0.6 track 0.01): -14.5,-7 -8,-7 -7.988,-7 -7.989,7.01 -8,7 -14.5,7 -14.489,7.01

## Keep-outs
Keep-Out Layer:
  circle w2.9: c0,0 r1.45
  region: 12.5,11 12.5,12.5 -12.6,12.5 -12.6,11
  region: 12.5,-12.5 12.5,-11 -12.5,-11 -12.5,-12.5

## Other copper
Top Layer:
  region net JD_DATA: -12.215,7.8 -9.9,7.8 -7.8,9.9 -7.8,12.216 -9.984,12.216 -12.215,9.985
  text "Top Layer" at 15.701,-4.75 h1.7
Bottom Layer:
  text "Bottom Layer" at 15.7,-6.25 h1.7

## Silkscreen, mask and mechanical layers (free items; w line width, h text height)
Top Overlay:
  lines w0.1: -9.398,-6.607 cw(c-10.024,-10) -8.423,-6.944 ccw(c-8.229,-7.72) -9.026,-7.653 ; -9.398,6.607 ccw(c-10.024,10) -8.423,6.944 cw(c-8.229,7.72) -9.026,7.653 ; -9.376,-6.612 ccw(c-9.469,-7.052) -9.563,-7.492 cw(c-10.024,-10) -9.051,-7.643 ; -9.376,6.612 cw(c-9.469,7.052) -9.563,7.492 ccw(c-10.024,10) -9.051,7.643 ; -7.677,-9.003 ccw(c-7.744,-8.206) -6.967,-8.399 cw(c-10.024,-10) -6.631,-9.374 ; -7.677,9.003 cw(c-7.744,8.206) -6.967,8.399 ccw(c-10.024,10) -6.631,9.374 ; -7.666,-9.027 cw(c-10.024,-10) -7.516,-9.539 ccw(c-7.075,-9.446) -6.635,-9.352 ; -7.666,9.027 ccw(c-10.024,10) -7.516,9.539 cw(c-7.075,9.446) -6.635,9.352 ; 6.583,-9.374 cw(c9.976,-10) 6.92,-8.399 ; 6.583,9.374 ccw(c9.976,10) 6.92,8.399 ; 6.588,-9.352 ccw(c7.028,-9.446) 7.468,-9.539 cw(c9.976,-10) 7.619,-9.027 ; 6.588,9.352 cw(c7.028,9.446) 7.468,9.539 ccw(c9.976,10) 7.619,9.027 ; 6.92,-8.399 ccw(c7.696,-8.206) 7.629,-9.003 ; 6.92,8.399 cw(c7.696,8.206) 7.629,9.003 ; 8.979,-7.653 ccw(c8.182,-7.72) 8.376,-6.944 cw(c9.976,-10) 9.35,-6.607 ; 8.979,7.653 cw(c8.182,7.72) 8.376,6.944 ccw(c9.976,10) 9.35,6.607 ; 9.003,-7.643 cw(c9.976,-10) 9.515,-7.492 ccw(c9.422,-7.052) 9.328,-6.612 ; 9.003,7.643 ccw(c9.976,10) 9.515,7.492 cw(c9.422,7.052) 9.328,6.612
  lines w0.2: -8.376,7.884 -8.39,7.484 ; -7.997,7.408 -8.39,7.484 ; -7.907,8.345 -7.508,8.366 ; -7.424,7.975 -7.508,8.366 ; 2.161,-2.552 3.25,-9.7 3.25,-11.05 2.25,-11.05 ; -8.39,7.484 ccw(c-10.024,10) -7.508,8.366
  lines w0.33: -9.124,-7.445 cw(c-8.783,-7.302) -8.708,-6.94 ; -9.124,7.445 ccw(c-8.783,7.302) -8.708,6.94 ; -7.469,-9.1 ccw(c-7.326,-8.759) -6.963,-8.685 ; -7.469,9.1 cw(c-7.326,8.759) -6.963,8.685 ; 6.916,-8.685 ccw(c7.278,-8.759) 7.421,-9.1 ; 6.916,8.685 cw(c7.278,8.759) 7.421,9.1 ; 8.661,-6.94 cw(c8.735,-7.302) 9.076,-7.445 ; 8.661,6.94 ccw(c8.735,7.302) 9.076,7.445
  lines w1: -9.454,-7.055 cw(c-10.024,-10) -9.309,-7.086 ; -9.454,7.055 ccw(c-10.024,10) -9.309,7.086 ; -7.11,-9.285 cw(c-10.024,-10) -7.078,-9.43 ; -7.11,9.285 ccw(c-10.024,10) -7.078,9.43 ; 7.031,-9.43 cw(c9.976,-10) 7.062,-9.285 ; 7.031,9.43 ccw(c9.976,10) 7.062,9.285 ; 9.261,-7.086 cw(c9.976,-10) 9.406,-7.055 ; 9.261,7.086 ccw(c9.976,10) 9.406,7.055
  text "MSR" at -1.172,11.27 h0.9
  text "-" at 8.619,8.146 h3.5 r135
  text "-" at 8.122,-8.643 h3.5 r45
  text "+" at -7.973,-8.67 h2.8 r315
  text "Top Overlay" at 15.701,-10.475 h1.7
  text "Temp" at -3.524,-11.05 h0.9
  text "& RH" at -3.524,-12.3 h0.9
Bottom Overlay:
  drawing of 248 lines, arcs and shapes, not listed
  text "-" at 8.643,8.146 h3.5 r135
  text "Bottom Overlay" at 24.3,-4.775 h1.7
  text "'.ProjectCodename'" at 7.13,-6.527 h1
  text "'.ProjectCodenameID'-'.ProjectRevision'" at 3.55,-8.25 h1
  text "-" at 8.146,-8.643 h3.5 r45
  text "+" at -7.95,-8.67 h2.8 r315
Top Paste:
  text "Top Paste" at 24.301,-6.182 h1.7
Bottom Paste:
  text "Bottom Paste" at 24.3,-7.66 h1.7
Top Solder:
  text "Top Solder (resist)" at 24.301,-8.982 h1.7
Bottom Solder:
  text "Bottom Solder (resist)" at 24.3,-10.473 h1.7
Drill Guide:
  text "Drill Guide" at 37.725,-8.985 h1.7
Dimension:
  text "Dimension" at 37.725,-7.685 h1.7
Fabrication Notes:
  lines w0.01: -14.5,-7 -8,-7 ; -14.5,7 -8,7 ; -14.489,7.01 -14.488,-7 ; -7.989,7.01 -7.988,-7
  lines w0.2: -16.25,-0.2 -12.4,-2.5 -10.65,-2.5 ; -16.25,0.2 -12.4,2.5 -10.65,2.5 ; -16.25,6 -14.5,6 ; -16.24,-10.737 0,-6.644 0,-2.7
  lines w1: -1.376,2.8 -1.377,1.966 ccw(c0,0) 1.377,1.966 1.377,2.8
  text "no board edge pips/ / rat's teeth/mouse bites  / in this region - make  / sure board edge is clean" at -32.397,4 h1.7
  text "non-plated slots x2" at -27.221,-0.407 h1.7
  text "Fabrication Notes" at 37.725,-4.785 h1.7
  text "\"horseshoe shaped\" / board cut-out" at -27.617,-11.8 h1.7
Route Tool Path:
  lines w1: -1.376,2.8 -1.377,1.966 ccw(c0,0) 1.377,1.966 1.377,2.8
Mechanical 9:
  lines w0.01: 25.77,-8.595 ccw(c23.445,-8.55) 25.77,-8.55
Board Outline:
  lines w0.2: -9.1,-3.3 -13.2,-3.3 cw(c-13.2,-2.5) -14,-2.5 -14,2.5 cw(c-13.2,2.5) -13.2,3.3 -9.1,3.3 ; -9.1,-3.3 cw(c-9.1,-4.3) -8.1,-4.3 -8.1,-5 cw(c-9.1,-5) -9.1,-6 -11.5,-6 ccw(c-11.5,-7) -12.5,-7 -12.5,-10 ccw(c-10,-10) -10,-12.5 -7.3,-12.5 ccw(c-7.3,-11.5) -6.593,-12.207 ; -9.098,3.3 ccw(c-9.098,4.3) -8.098,4.3 ; -8.1,4.3 -8.1,5 ccw(c-9.1,5) -9.1,6 -11.5,6 cw(c-11.5,7) -12.5,7 -12.5,10 cw(c-10,10) -10,12.5 -7.75,12.5 cw(c-7.75,12.25) -7.5,12.25 -7.5,12 ccw(c-6.5,12) -6.5,11 ccw(c-6.5,13.5) -5.7,11.131 ; -6.6,-12.21 -6.11,-11.718 ; -6.112,-11.716 cw(c-5.369,-12.385) -4.946,-11.479 ; -5.698,11.126 cw(c0,0) 4.947,11.48 ccw(c5.369,12.385) 6.112,11.716 ; -4.904,-11.498 ccw(c0,0) 4.947,-11.48 ; 4.946,-11.479 cw(c5.369,-12.385) 6.112,-11.716 ; 6.11,-11.718 6.6,-12.21 ; 6.11,11.718 6.6,12.21 ; 6.593,-12.207 ccw(c7.3,-11.5) 7.3,-12.5 10,-12.5 ccw(c10,-10) 12.5,-10 12.5,-7.3 ccw(c11.5,-7.3) 12.207,-6.593 ; 6.593,12.207 cw(c7.3,11.5) 7.3,12.5 10,12.5 cw(c10,10) 12.5,10 12.5,7.3 cw(c11.5,7.3) 12.207,6.593 ; 11.479,-4.946 ccw(c12.385,-5.369) 11.716,-6.112 ; 11.479,4.946 cw(c12.385,5.369) 11.716,6.112 ; 11.48,-4.947 ccw(c0,0) 11.48,4.947 ; 11.718,-6.11 12.21,-6.6 ; 11.718,6.11 12.21,6.6
  text "Board Outline" at 37.725,-6.185 h1.7
Top Assy:
  text "Top Assy" at 15.701,-7.575 h1.7
Bottom Assy:
  text "Bottom Assy" at 15.7,-8.975 h1.7
Drill Drawing:
  text "Drill Drawing" at 24.3,-11.875 h1.7
Component Keepout Dwg:
  lines w0.01: -12.5,-7 cw(c-11.5,-7) -11.5,-6 -9.1,-6 ccw(c-9.1,-5) -8.1,-5 -8.1,-4.3 ccw(c-9.1,-4.3) -9.1,-3.3 -13.2,-3.3 cw(c-13.2,-2.5) -14,-2.5 -14,2.5 cw(c-13.2,2.5) -13.2,3.3 -9.1,3.3 ccw(c-9.1,4.3) -8.1,4.3 -8.1,5 ccw(c-9.1,5) -9.1,6 -11.5,6 cw(c-11.5,7) -12.5,7
  lines w0.025: -12.5,-7.018 -12.5,-10 ccw(c-10,-10) -10,-12.5 -7.729,-12.5 10,-12.5 ccw(c10,-10) 12.5,-10 12.5,-7.554 ; -12.5,7.003 -12.5,10 cw(c-10,10) -10,12.5 -7.729,12.5 ; -7.75,12.5 cw(c-7.75,12.25) -7.5,12.25 -7.5,12 ccw(c-6.5,12) -6.656,11.012 ; -6.65,11.015 cw(c-10,10) -7,8.197 -7,-8.197 cw(c-10,-10) -6.646,-11 6.646,-11 cw(c10,-10) 12.503,-7.554 ; 12.5,7.554 12.5,10 ccw(c10,10) 10,12.5 -5.25,12.5 ccw(c-5.25,12.25) -5.5,12.25 -5.5,12 cw(c-6.5,12) -6.5,11 6.646,11 ccw(c10,10) 12.503,7.554
  text "Component Keepout" at 37.726,-10.497 h1.7
Routing Keepout Dwg:
  lines w0.01: -13.6,-2.468 ccw(c-13.2,-2.468) -13.2,-2.868 -9.3,-2.868 -9.3,2.874 -13.198,2.874 ; -13.6,-2.466 -13.6,2.477 ; -13.6,2.474 cw(c-13.2,2.474) -13.2,2.874
  lines w0.025: -12.5,8.342 ccw(c-10,10) -8.342,12.5 ; -12.5,10 cw(c-10,10) -10,12.5 -8.342,12.5 ; 12.5,8.342 12.5,10 ccw(c10,10) 10,12.5 8.342,12.5 ccw(c10,10) 12.5,8.342 ; -12.5,-10 ccw(c-10,-10) -10,-12.5 -8.342,-12.5 ccw(c-10,-10) -12.5,-8.342 -12.5,-10 ; 8.342,-12.5 cw(c10,-10) 12.5,-8.342 12.5,-10 cw(c10,-10) 10,-12.5 8.342,-12.5
  text "Routing Keepout" at 37.8,-11.875 h1.7

## Text inside footprints (layer, text, board x,y; h text height)
EC1: Mechanical 9 "Jacdac / cable connector  / body" at -18.158,-4.821 h1.7 r90